# EAGLE board FD Capacitance Sensor v08? (EAGLE 9.5.2)
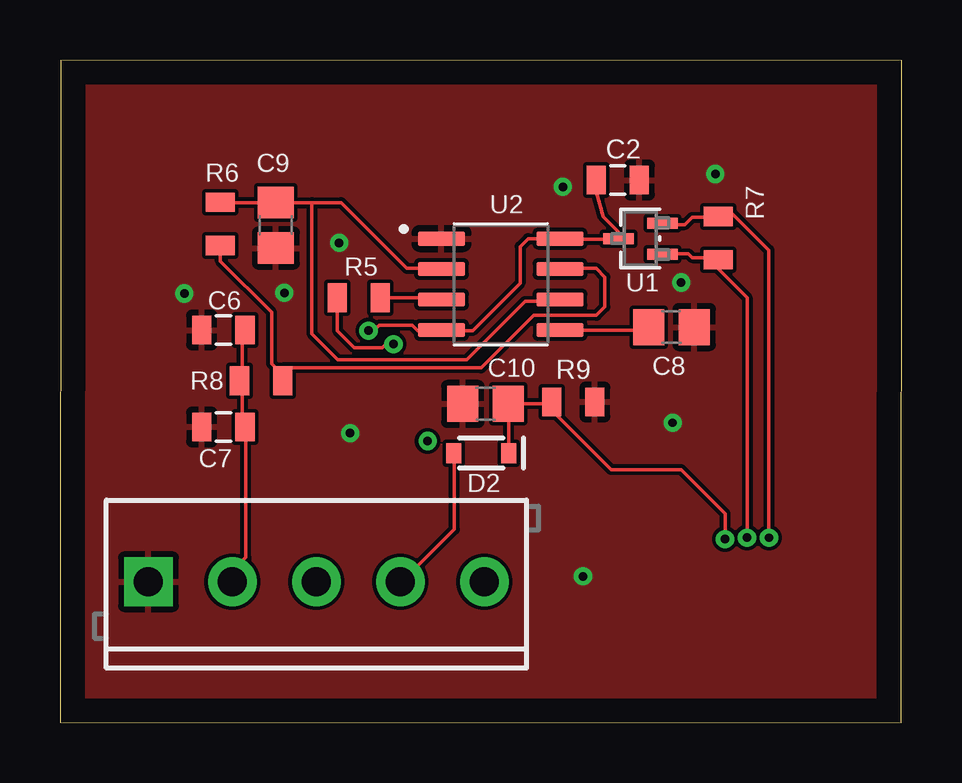
[diagram p0: board, top side]
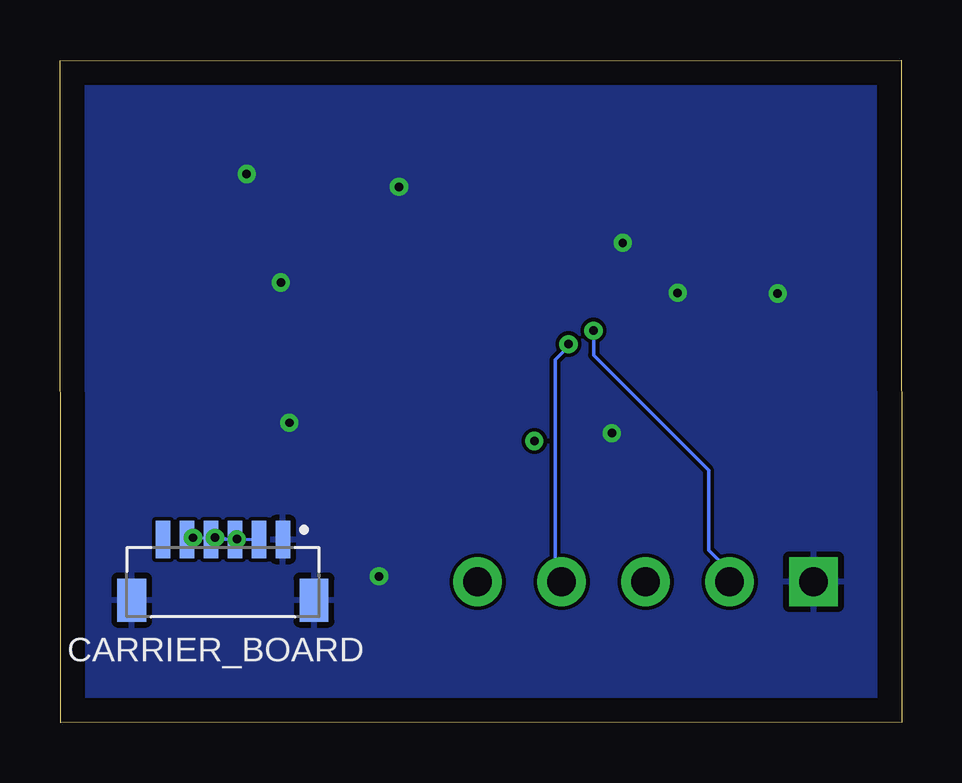
[diagram p1: board, bottom side, seen from below]

Size 35.08 x 27.61 mm. Coordinates in mm from the lower left corner, seen from the top.
Outline: 0,0.03 35.06,0 35.08,27.58 0.03,27.61 0,0.03
Copper layers (1*16): Top 0.035mm / dielectric 1.5mm / Bottom 0.035mm
Design rules "default": minimum track width 6mil, minimum drill 0.35mm, track to track 6mil, track to pad 6mil, pad to pad 6mil, via to via 6mil, smd to smd 6mil, copper to edge 40mil, drill to drill 6mil, minimum pad ring 10mil, minimum via ring 8mil, stop-mask expansion 4mil, vias tented up to drill 0mil, thermal gap 10mil

## Footprints (pad centres in the part's own frame; a part is rotated, then mirrored left to right if it is on the bottom)
0805@1 = smd 0.8 x 1.2: 1 -0.9,0; 2 0.9,0
C0805 = smd 1.3 x 1.5: 1 -0.95,0; 2 0.95,0
JST_BM06B-SRSS-TB(LF)(SN) = smd 0.6 x 1.55: 1 -2.5,-2.525; 2 -1.5,-2.525; 3 -0.5,-2.525; 4 0.5,-2.525; 5 1.5,-2.525; 6 2.5,-2.525 | smd 1.2 x 1.8: S1 -3.8,0; S2 3.8,0
SOD-323 = smd 0.63 x 0.83: A 1.15,0; C -1.15,0
SCREWTERMINAL-3.5MM-5 = drill 1.2 pad 2.032 square: 1 0,0 | drill 1.2 pad 2.032: 2 3.5,0; 3 7,0; 4 10.5,0; 5 14,0
0805 = smd 0.8 x 1.2: 1 -0.9,0; 2 0.9,0
SOT_101PT1_ONS = smd 0.457 x 1.27: 1 -0.65,-0.914; 2 0.65,-0.914; 3 0,0.914
SOIC127P599X175-8N = smd 1.97 x 0.6: 1 -2.47,1.905; 2 -2.47,0.635; 3 -2.47,-0.635; 4 -2.47,-1.905; 5 2.47,-1.905; 6 2.47,-0.635; 7 2.47,0.635; 8 2.47,1.905

## Placement (x,y rotation side)
C2  1uF  [0805@1]  23.24,22.61 0 top
C6  10nF  [0805@1]  6.81,16.36 180 top
C7  0.1uF  [0805@1]  6.81,12.32 180 top
C8  10nf  [C0805]  25.48,16.48 180 top
C9  470pf  [C0805]  8.99,20.73 90 top
C10  1uF  [C0805]  17.73,13.28 0 top
CARRIER_BOARD  BM06B-SRSS-TBT(LF)(SN)  [JST_BM06B-SRSS-TB(LF)(SN)]  28.3,5.11 180 bottom
D2  250mA/100V  [SOD-323]  17.55,11.23 180 top
FRAME1  FRAME-LETTERNO_PACKAGE  [DUMMY]  -1.55,-6.17 0 top  (outside the outline)
J1  [SCREWTERMINAL-3.5MM-5]  3.68,5.87 0 top
R5  10k  [0805]  12.45,17.7 180 top
R6  1k  [0805]  6.68,20.78 270 top
R7  100k  [0805]  27.43,20.19 90 top
R8  330  [0805]  8.38,14.25 180 top
R9  1M  [0805]  21.39,13.36 180 top
U1  NTS4101PT1  [SOT_101PT1_ONS]  24.18,20.17 90 top
U2  TLC555CD  [SOIC127P599X175-8N]  18.36,18.26 0 top

## Library data of the parts
C2 = Custom Components; HOUSEPART: yes; MPN: MF-CAP-0805-1uF; POPULATE: 1; URL: https://factory.macrofab.com/part/MF-CAP-0805-1uF
C6 = Custom Components; DIGIKEY: 399-C0805X103K1RAC3316CT-ND; HOUSEPART: NO; MPN: C0805X103K1RAC3316; POPULATE: 1; URL: https://www.digikey.com/en/products/detail/kemet/C0805X103K1RAC3316/10315780
C7 = Custom Components; HOUSEPART: YES; MPN: MF-CAP-0805-0.1uF; POPULATE: 1; URL: https://factory.macrofab.com/part/MF-CAP-0805-0.1uF
C8-C10 = rcl
CARRIER_BOARD = Custom Components; MPN: BM06B-SRSS-TBT(LF)(SN); POPULATE: 1
D2 = Custom Components; MPN: BAS16HT1G
FRAME1 = SparkFun-Aesthetics; DESIGNER: Nobody; VERSION: v01
J1 = SparkFun-Connectors; PROD_ID: Combine 8288+8399
R5 = Custom Components; MPN: MF-RES-0805-10K; POPULATE: 1; URL: https://factory.macrofab.com/part/MF-RES-0805-10K
R6 R9 = Custom Components; HOUSEPART: YES; MPN: MF-RES-0805-1K; POPULATE: 1; URL: https://factory.macrofab.com/part/MF-RES-0805-1k
R7 = Custom Components; MPN: MF-RES-0805-100K; POPULATE: 1; URL: https://factory.macrofab.com/part/MF-RES-0805-100K
R8 = Custom Components; HOUSEPART: YES; MPN: MF-RES-0805-330; POPULATE: 1
U1 = Custom Components; DATASHEET: https://datasheet.octopart.com/NTS4101PT1-ON-Semiconductor-datasheet-139013286.pdf; MANUFACTURER_PART_NUMBER: NTS4101PT1; SOURCELIBRARY: ON_Semiconductor_2020-03-06; VENDOR: ON Semiconductor
U2 = Custom Components; DESCRIPTION: 2.1-MHz, 250-A, Low-Power Timer 8-SOIC 0 to 70; DIGI-KEY_PART_NUMBER: 296-52992-ND; MF: Texas Instruments; MP: TLC555CD; PACKAGE: SOIC-8 Texas Instruments; PURCHASE-URL: https://pricing.snapeda.com/search/part/TLC555CD/?ref=eda

## Nets
!EN: CARRIER_BOARD.3 R7.1 U1.1
+3V3: CARRIER_BOARD.2 R7.2 U1.2
GND: C2.2 C6.2 C7.2 C8.1 C9.1 C10.1 CARRIER_BOARD.1 CARRIER_BOARD.S1 CARRIER_BOARD.S2 J1.1 R9.1 U2.1
N$1: C8.2 U2.5
N$5: R5.1 U2.3
N$8: C9.2 R6.1 U2.2 U2.6
N$9: R6.2 R8.1 U2.7
NC: CARRIER_BOARD.6
OUTPUT1: C10.2 CARRIER_BOARD.4 D2.C R9.2
OUTPUT2: CARRIER_BOARD.5
SENSOR1: D2.A J1.4 R5.2
SENSOR2: J1.5
SHEILD: J1.3
VCC: C2.1 C6.1 C7.1 J1.2 R8.2 U1.3 U2.4 U2.8

## Tracks (layer width: path | path; a pad name or v marks a point on that pad's centre or on a via)
!EN  (via drill 0.35)
  Top 0.152: U1.1 25.12,19.53 26.19,19.53 26.34,19.38 27.41,19.38 R7.1 27.41,19.23 27.41,18.92 28.63,17.7 v28.63,7.71
  Bottom 0.152: v28.63,7.71 CARRIER_BOARD.3
+3V3  (via drill 0.35)
  Top 0.152: U1.2 25.12,20.75 26.04,20.75 26.34,21.06 27.41,21.06 R7.2 27.56,21.21 28.02,21.21 29.54,19.69 v29.54,7.7
  Bottom 0.152: v29.54,7.7 CARRIER_BOARD.2
GND  (via drill 0.35)
  other vias: 12.09,12.06 5.18,17.88 9.35,17.91 11.63,19.99 21.79,6.1 25.53,12.5 25.88,18.34 27.3,22.86 20.95,22.33
  pour Top: -2.49,-3 -2.49,29.69 40.82,29.69 40.82,-2.95 -2.44,-2.95
  pour Bottom: -1.42,-2.11 -1.42,29.06 40.03,29.06 40.03,-2.11
N$1
  Top 0.152: 20.85,16.33 U2.5 24.4,16.36 C8.2 24.51,16.48
N$2  (via drill 0.35)
  other vias: 15.32,11.73
N$5
  Top 0.152: R5.1 15.82,17.7 U2.3
N$8
  Top 0.152: U2.6 20.7,17.55 19.38,17.55 16.94,15.11 11.58,15.11 10.49,16.21 10.49,21.67 | R6.1 8.97,21.67 C9.2 9.12,21.67 10.49,21.67 | 10.49,21.67 11.71,21.67 14.45,18.92 15.82,18.92 U2.2
N$9
  Top 0.152: 9.27,14.5 9.27,14.35 R8.1 9.27,14.5 | U2.7 20.85,18.92 22.35,18.92 22.71,18.57 22.71,17.32 22.35,16.97 19.74,16.97 17.55,14.78 9.27,14.78 9.27,14.5 | R6.2 6.68,19.23 8.81,17.09 8.81,14.96 9.27,14.5
OUTPUT1  (via drill 0.35)
  Top 0.152: 20.4,13.26 R9.2 | R9.2 20.41,13.28 18.72,13.28 | 18.72,13.28 18.72,12.98 | 18.72,13.28 C10.2 18.72,12.98 | 18.82,11 18.62,11 D2.C 18.7,12.96 18.72,12.98 | v27.71,7.65 27.71,8.71 25.88,10.54 22.96,10.54 20.55,12.95 20.55,13.28 R9.2
  Bottom 0.152: v27.71,7.65 CARRIER_BOARD.4
SENSOR1  (via drill 0.35)
  Top 0.152: R5.2 11.56,16.33 12.27,15.62 13.44,15.62 13.54,15.72 13.84,15.72 v13.89,15.77 | J1.4 14.25,5.87 16.43,8.05 16.43,11.13 D2.A
  Bottom 0.152: v13.89,15.77 13.99,15.72 13.99,15.57 14.45,15.11 14.45,6.12 14.3,5.97 J1.4
VCC  (via drill 0.35)
  Top 0.152: C2.1 22.34,22.13 22.64,21.07 23.27,20.45 U1.3 23.14,20.14 20.85,20.14 U2.8 19.51,20.17 19.18,19.84 19.18,18.31 17.2,16.33 15.98,16.33 U2.4 15.82,16.33 14.91,16.33 14.68,16.56 13.31,16.56 13.08,16.33 v12.85,16.33 | C6.1 7.59,16.33 7.59,14.35 R8.2 7.59,14.2 7.59,12.37 C7.1 7.75,12.22 7.75,6.88 7.29,6.43 7.29,5.97 J1.2
  Bottom 0.152: 7.29,6.43 7.29,5.97 J1.2 7.29,6.43 | v12.85,16.33 12.85,15.32 8.05,10.52 8.05,7.19 7.29,6.43